# Altium PCB PSU_module.PcbDoc
Units mil, origin at the board's own origin, x right, y up, seen from the top; angles counter-clockwise.
Board outline 5905.51 x 3937.01 mil, 2 copper layers (Top Layer, Bottom Layer); 47 components, 31 nets, 121 pads, 10 vias.
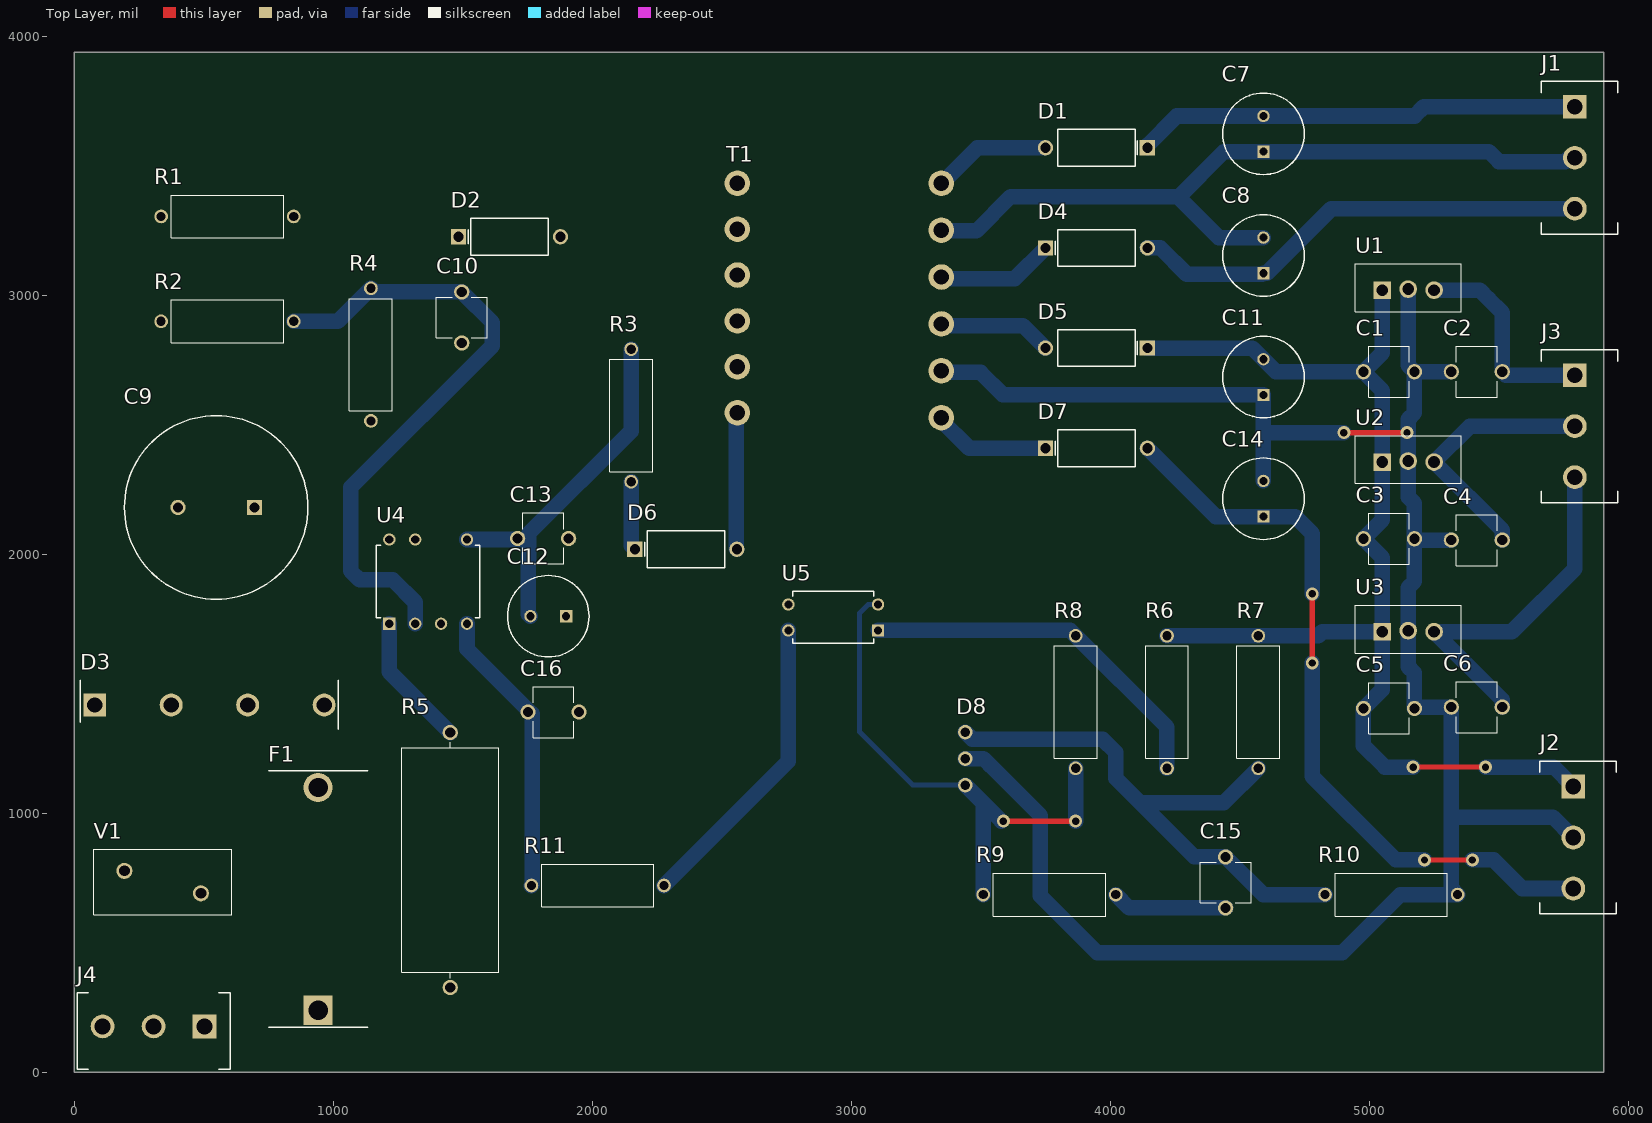
[diagram p0: Top Layer view]
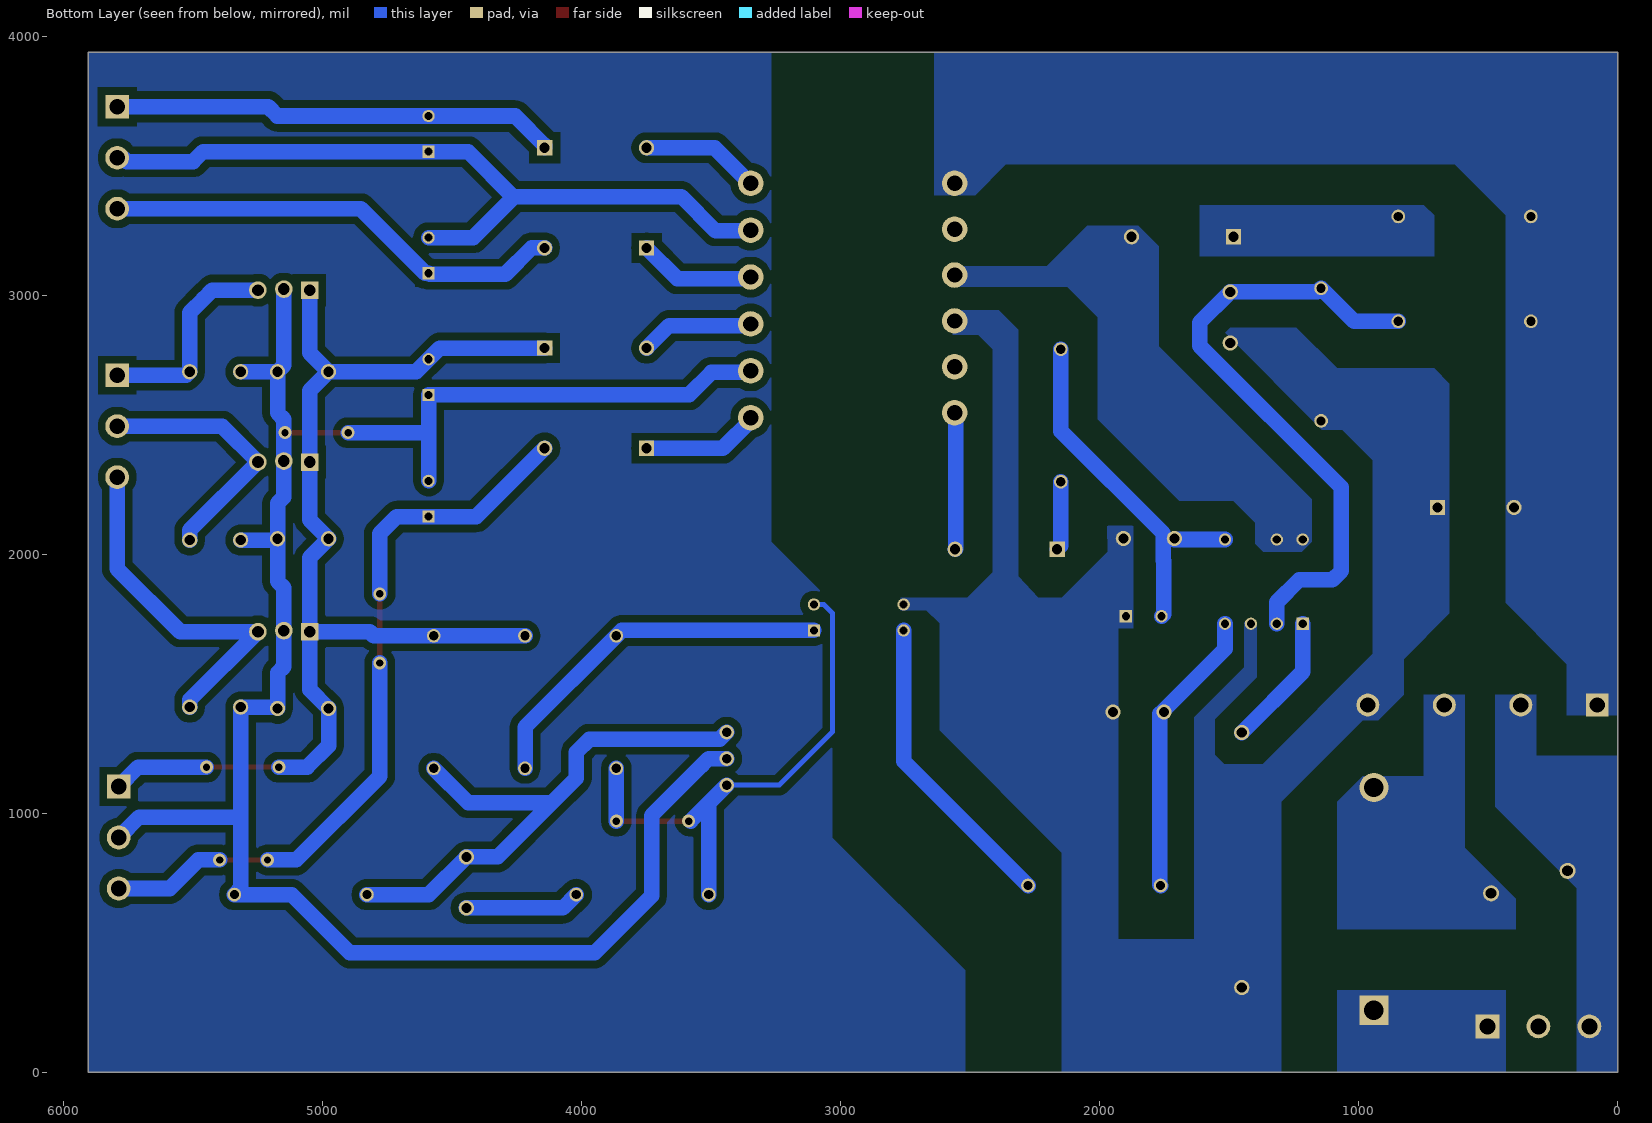
[diagram p1: Bottom Layer view, seen from below]
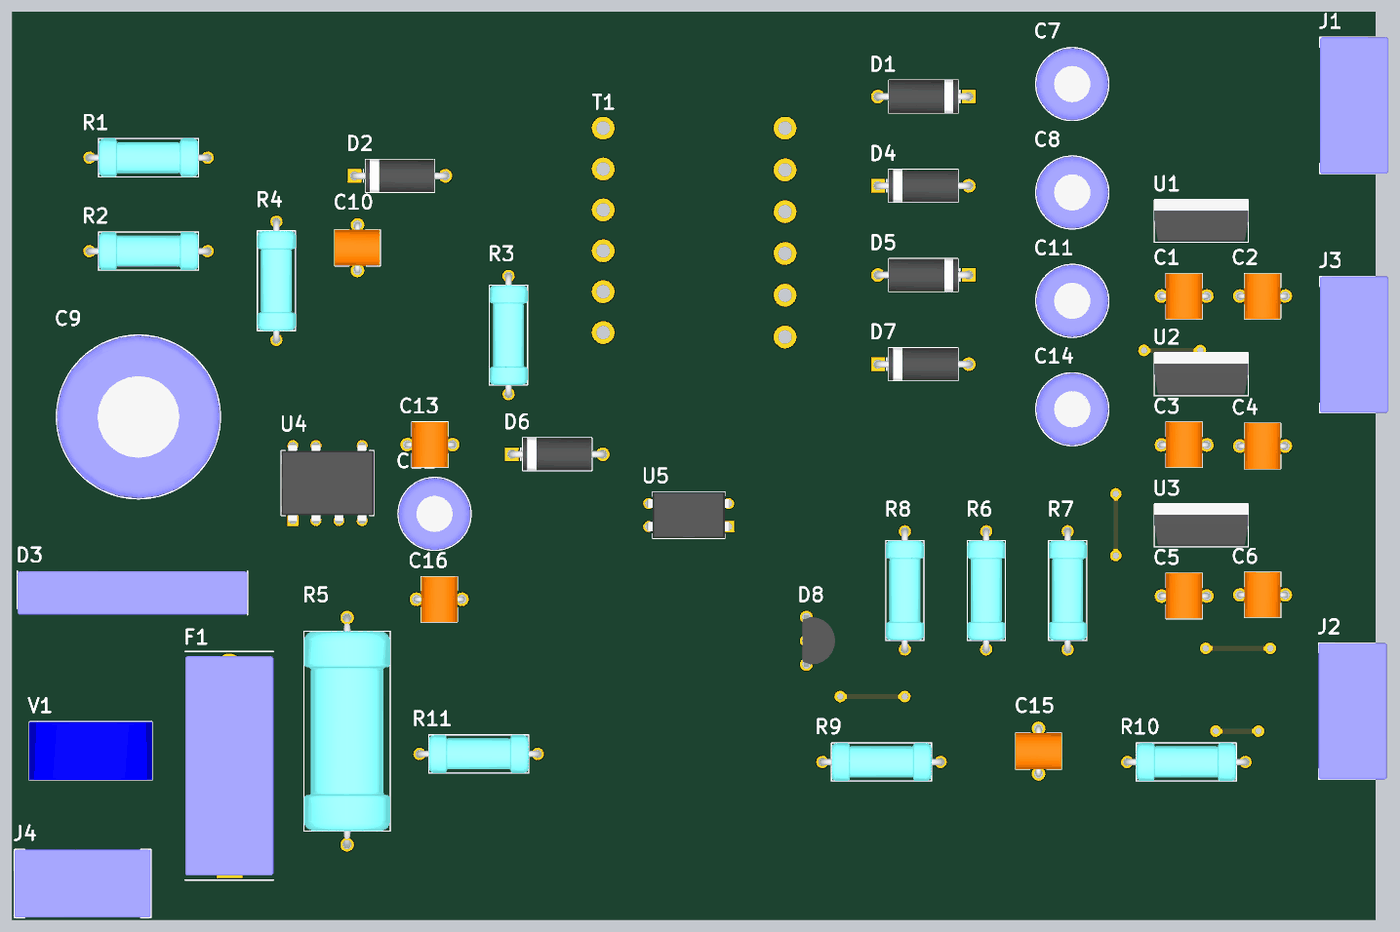
[diagram p2: 3D render of the assembled board from above, using the file's embedded part models]

## Layer stack, top to bottom
Top Solder: solder mask 0.4, Solder Resist, Dk 3.5
Top Layer: signal copper 1.4
Dielectric 1: dielectric 12.6, FR-4, Dk 4.8
Bottom Layer: signal copper 1.4
Bottom Solder: solder mask 0.4, Solder Resist, Dk 3.5

## Board outline
0,0 0,3937.01 5905.51,3937.01 5905.51,0

## Design rules (kind name [scope] priority, off if disabled: settings)
Clearance [All] p1: gap=10 ignorepadtopadclearanceinfootprint=FALSE except(0: Arc-Hole Track-Hole SMDPad-Hole THPad-Hole Via-Hole Fill-Hole Region-Hole Text-Hole; 30: Arc-Poly Track-Poly SMDPad-Poly THPad-Poly Via-Poly Fill-Poly Poly-Poly Poly-Region Poly-Text Poly-Hole)
HoleSize [All] p1: absolutevalues=TRUE maxlimit=200 minlimit=1 maxpercent=80.000 minpercent=20.000
PolygonConnect [All] p1: connectstyle=Direct reliefconductorwidth=10 reliefentries=4 polygonreliefangle="90 Angle" airgapwidth=10
RoutingVias [All] p1: holewidth=28 width=50 viastyle="Through Hole" minholewidth=28 minwidth=50 maxholewidth=28 maxwidth=50
SolderMaskExpansion [All] p1: expansion=4 istentingtop=FALSE
Width [All] p1: maxlimit=60 minlimit=10 preferedwidth=20
29 further rules are at their usual default settings.

## Components (designator, comment, footprint, x,y, rotation, side; value= is the part's Value field where it differs from the comment)
C1 "Capacitor-NP" C-NP 5075.65,2703.94 r180 top value=330nF
C2 "Capacitor-NP" C-NP 5415,2703.94 r0 top value=100nF
C3 "Capacitor-NP" C-NP 5075.65,2058.94 r180 top value=330nF
C4 "Capacitor-NP" C-NP 5415,2053.94 r0 top value=100nF
C5 "Capacitor-NP" C-NP 5075.65,1403.94 r180 top value=330nF
C6 "Capacitor-NP" C-NP 5415,1408.94 r0 top value=100nF
C7 "Capacitor-P" C-P-50V 4591.1,3622.36 r90 top value=47uF
C8 "Capacitor-P" C-P-50V 4591.1,3152.73 r90 top value=47uF
C9 "Capacitor-P" C-P-400V 547.64,2180 r180 top value=47uF
C10 "Capacitor-NP" C-NP 1496.06,2913.39 r90 top value=1nF
C11 "Capacitor-P" C-P-50V 4591.1,2683.1 r90 top value=47uF
C12 "Capacitor-P" C-P-50V 1830,1760 r180 top value=47uF
C13 "Capacitor-NP" C-NP 1810,2060 r180 top value=100nF
C14 "Capacitor-P" C-P-50V 4591.1,2213.46 r90 top value=47uF
C15 "Capacitor-NP" C-NP 4445,731.91 r270 top value=5nF
C16 "Capacitor-NP" C-NP 1850,1390 r180 top value=1nF
D1 "Diode" Diode 3946.1,3568.46 r180 top
D2 "Diode" Diode 1680,3225 r0 top
D3 "BridgeRectifier" BridgeRectifier 521.65,1417.32 r0 top
D4 "Diode" Diode 3946.1,3181.8 r0 top
D5 "Diode" Diode 3946.1,2795.13 r180 top
D6 "Diode" Diode 2361.1,2018.46 r0 top
D7 "Diode" Diode 3946.1,2408.46 r0 top
D8 "431-zener" 431-zener 3440,1312.36 r270 top
F1 "Fuse" FuseHolder 941.1,668.46 r90 top value="Fuse holder"
J1 "Molex Micro-Latch" ScrewTerminal 5811.1,3530 r270 top
J2 "Molex Micro-Latch" ScrewTerminal 5805.12,905.51 r270 top
J3 "Molex Micro-Latch" ScrewTerminal 5811.1,2493.46 r270 top
J4 "Molex Micro-Latch" ScrewTerminal 306.1,158.46 r180 top
R1 "1k" R-2W 591.1,3303.46 r0 top
R2 "1MOhm" R-2W 591.1,2898.46 r180 top
R3 "1k" R-2W 2150,2535 r90 top
R4 "10kOhm" R-2W 1145,2770 r90 top
R5 "390mOhm" R-5W 1451.1,818.46 r90 top
R6 "1k" R-2W 4218.6,1428.46 r90 top
R7 "1MOhm" R-2W 4571.1,1428.46 r90 top
R8 "1k" R-2W 3866.1,1428.46 r90 top
R9 "1k" R-2W 3765,685 r180 top
R10 "270kOhm" R-2W 5085,685 r180 top
R11 "120Ohm" R-2W 2020.63,720 r180 top
T1 "-" CustomTrafo 2560,3431.5 r0 top
U1 "Linear-regulator" LinearReg 5050,3018.94 r0 top
U2 "Linear-regulator" LinearReg 5050,2355 r0 top
U3 "Linear-regulator" LinearReg 5050,1700 r0 top
U4 "NCP11187" NCP11187 1366.1,1893.46 r0 top
U5 "Optocoupler" Opto 2930,1755 r90 top
V1 "Varistor" VARRBO750W80L1350T640H1650 341.1,733.46 r0 top

## Footprints (in the part's own frame and the unit in brackets; to place one, negate y for a bottom-side part, rotate by r counter-clockwise, add the part's x,y. Pads: shape width x height; smd on the part's side, far side on the other; paste and mask are expansions set on the pad)
431-zener [mm] "TO-92, 2.60 mm pitch; 3 pin, 5.21 mm W X 5.34 mm H body"
  round 1.43 hole 0.95 paste-1.43: 1(5.2,0) 2(0,0) 3(2.6,0)
  body extent -0.23,-0.45 5.43,3.15, height 9.34
BridgeRectifier [mm] "SIP, 7.50 mm pitch; 4 pin, 25.30 mm L X 4.80 mm W X 19.00 mm H body"
  rect 2.25x2.25 / inner round 2.25 / far side rect 2.25x2.25 hole 1.5 paste-2.25: 1(-11.25,0)
  round 2.25 hole 1.5 paste-2.25: 2(-3.75,0) 3(3.75,0) 4(11.25,0)
  silkscreen extent -12.65,-2.4 12.65,2.4, body extent -12.65,-2.4 12.65,2.4, height 19
C-NP [mm] "Capacitor, Radial (Disk), 5.00 mm Pitch X 0.80 mm W X 4.00 mm L X 5.00 mm T X 6.00 mm H body"
  round 1.5 hole 1 paste-1.5: 1(-2.5,0) 2(2.5,0)
  silkscreen extent -2,-2.5 2,2.5, body extent -2.8,-2.5 2.8,2.5, height 6
C-P-50V [mm] "Capacitor, Polarized, Radial (Electrolytic); 3.50 mm Pitch X 8.00 mm Dia X 11.50 mm H body"
  rect 1.21x1.21 / inner round 1.21 / far side rect 1.21x1.21 hole 0.8 paste-1.21: 1(-1.75,0)
  round 1.21 hole 0.8 paste-1.21: 2(1.75,0)
  silkscreen extent -4,-4 4,4, body extent -4,-4 4.01,4, height 11.51
C-P-400V [mm] "Capacitor, Polarized, Radial (Electrolytic); 7.50 mm Pitch X 18.00 mm Dia X 20.00 mm H body"
  rect 1.5x1.5 / inner round 1.5 / far side rect 1.5x1.5 hole 1 paste-1.5: 1(-3.75,0)
  round 1.5 hole 1 paste-1.5: 2(3.75,0)
  silkscreen extent -9,-9 9,9, body extent -9,-9 9.01,9, height 20.01
CustomTrafo [mm]
  round 2.5 hole 1.5: 1(0,0) 2(0,-4.5) 3(0,-9) 4(0,-13.5) 5(0,-18) 6(0,-22.5) 7(20,-22.987) 8(20,-18.39) 9(20,-13.792) 10(20,-9.195) 11(20,-4.597) 12(20,0)
Diode [mm] "Diode, Axial; 10.00 mm Pitch X 0.75 mm W 7.60 mm L X 5.00 mm Dia. body"
  round 1.5 hole 1 paste-1.5: A(5,0)
  rect 1.5x1.5 / inner round 1.5 / far side rect 1.5x1.5 hole 1 paste-1.5: C(-5,0)
  silkscreen extent -4.03,-1.8 3.8,1.8, body extent -5.38,-1.81 5.38,1.81, height 5.01
FuseHolder [mm] "SIP, 21.84 mm pitch; 2 pin, 24.16 mm L X 9.70 mm W X 11.00 mm H body"
  rect 2.85x2.85 / inner round 2.85 / far side rect 2.85x2.85 hole 1.9 paste-2.85: 1(-10.92,0)
  round 2.85 hole 1.9 paste-2.85: 2(10.92,0)
  silkscreen extent -12.57,-4.85 12.57,4.85, body extent -12.08,-4.85 12.08,4.85, height 11
LinearReg [mm] "Flange Mount (TO) Vertical, 2.54 mm pitch; 3 pin, 10.36 mm W X 4.70 mm H X 19.65 mm mounted height"
  rect 1.73x1.73 / inner round 1.73 / far side rect 1.73x1.73 hole 1.15 paste-1.73: 1(0,0)
  round 1.73 hole 1.15 paste-1.73: 2(2.54,0.1) 3(5.08,0)
  silkscreen extent -2.64,-2.1 7.72,2.6, body extent -2.64,-2 7.72,2.7, height 19.65
NCP11187 [mm] "DIP, 8.26 mm lead span, 2.54 mm pitch; 8 pin, 10.16 mm L X 7.11 mm W X 5.33 mm H body"
  rect 1.21x1.21 / inner round 1.21 / far side rect 1.21x1.21 hole 0.8 paste-1.21: 1(-3.81,-4.13)
  round 1.21 hole 0.8 paste-1.21: 2(-1.27,-4.13) 3(1.27,-4.13) 4(3.81,-4.13) 5(3.81,4.13) 6(-1.27,4.13) 7(-3.81,4.13)
  silkscreen extent -5.08,-3.55 5.08,3.55, body extent -5.08,-4.27 5.08,4.27, height 5.33
Opto [mm] "DIP, 8.80 mm lead span, 2.54 mm pitch; 4 pin, 5.10 mm L X 7.92 mm W X 4.50 mm H body"
  rect 1.21x1.21 / inner round 1.21 / far side rect 1.21x1.21 hole 0.8 paste-1.21: 1(-1.27,-4.4)
  round 1.21 hole 0.8 paste-1.21: 2(1.27,-4.4) 3(1.27,4.4) 4(-1.27,4.4)
  silkscreen extent -2.55,-3.96 2.55,3.96, body extent -2.55,-4.53 2.55,4.53, height 4.5
R-2W [mm] "Resistor, Axial; 13.00 mm Pitch X 0.70 mm W 11.00 mm L X 3.00 mm Dia. body"
  round 1.35 hole 0.9 paste-1.35: 1(-6.5,0) 2(6.5,0)
  silkscreen extent -5.5,-2.1 5.5,2.1, body extent -6.85,-2.1 6.85,2.1, height 3
R-5W [mm] "Resistor, Axial; 25.00 mm Pitch X 0.75 mm W 22.00 mm L X 5.00 mm Dia. body"
  round 1.5 hole 1 paste-1.5: 1(-12.5,0) 2(12.5,0)
  silkscreen extent -11.57,-4.75 11.57,4.75, body extent -12.88,-4.75 12.88,4.75, height 5
ScrewTerminal [mm] "SIP, 5.00 mm pitch; 3 pin, 15.00 mm L X 7.50 mm W X 10.00 mm H body"
  rect 2.33x2.33 / inner round 2.33 / far side rect 2.33x2.33 hole 1.55 paste-2.33: 1(-5,-0.45)
  round 2.33 hole 1.55 paste-2.33: 2(0,-0.45) 3(5,-0.45)
  silkscreen extent -7.5,-3.75 7.5,3.75, body extent -7.5,-3.75 7.5,3.75, height 10
VARRBO750W80L1350T640H1650 [mm] "Varistor, Radial (Disk with Offset Leads), 7.50 mm Pitch X 0.80 mm W X 13.50 mm L X 6.40 mm T X 16.50 mm H body"
  round 1.58 hole 1.05 paste-1.58: 1(-3.75,1.1) 2(3.75,-1.1)
  silkscreen extent -6.75,-3.2 6.75,3.2, body extent -6.75,-3.2 6.75,3.2, height 16.5

## Part data
F1: library part F_30A, FR_SN=F-04, Part Number=F_30A
J1 J2 J3 J4: library part "Molex Micro-Latch 1x3", Manufacturer Part Number=53254-0370, Supplier Part Number=538-53254-0370, ComponentLinkDescription=Datasheet, ComponentLinkURL=https://hr.mouser.com/datasheet/2/276/0532540370_PCB_HEADERS-171041.pdf, FR_SN=J-13, Part Number="Molex Micro-Latch 1x3"
R1 R2 R3 R4 R5 R6 R7 R8 R9 R10 R11: library part Resistor
T1: library part "Custom transformer", ComponentLinkDescription=-, ComponentLinkURL=-, DC Current Rating=-, FR_SN=T-2, Inductor Case Style=-, Manufacturer Part Number=-, Part Number="Custom transformer", Supplier Part Number=-
U5: library part ACPL-217, Diode Case Style=SOIC-4, Forward Current="50 mA", Manufacturer Part Number=ACPL-217-56BE, Max Reverse Voltage=6V, Supplier Part Number=630-ACPL-217-56BE, ComponentLinkDescription=Datasheet, ComponentLinkURL=https://eu.mouser.com/datasheet/2/678/AV02-0470EN_DS_ACPL-217_2018-02-12-1827799.pdf, Diode Type=-, FR_SN=D_LED-09, Part Number=ACPL-217
V1: library part B72314S2351K101, FR_SN=Var-01, Part Number=B72314S2351K101

## Via types
v1: diameter 50, hole 28, Top Layer to Bottom Layer, 10 vias

## Nets (pads, with @x,y where several pads share a name; then routed paths per layer and width w, separated by ;. In a path a pad name is that pad's centre, name@x,y a point inside that pad or via, vN(x,y) a via of type N, cw(c..) or ccw(c..) an arc to the next point about the centre after c; other vN are vias at no path point)
3V3: C6.2 J3.3 U3.3 | length 1397.6
  Bottom Layer w60: C6.2 5513.43,1436.57 U3.3 5550,1700 5793.39,1943.39 J3.3
5V: C4.2 J3.2 U2.3 | length 1010.9
  Bottom Layer w60: C4.2 5513.43,2091.57 U2.3 5388.46,2493.46 J3.2
9V: C2.2 J3.1 U1.3 | length 812.9
  Bottom Layer w60: U1.3 5426.06,3018.94 5459.98,2985.02 5513.43,2931.57 C2.2 5527.05,2690.32 J3.1
+12V: C1.2 C3.2 C5.2 C11.2 D5.C J2.1 R6.2 R7.2 U1.1 U2.1 U3.1 | length 4495.2
  Top Layer w20: v1(5169.29,1177.17) v1(5448.82,1177.17)
  Bottom Layer w60: D5.C 4547.97,2795.13 C11.2 4639.16,2703.94 C1.2 ; R6.2 R7.2 4802.74,1684.37 4818.37,1700 U3.1 ; U1.1 5050,2776.71 C1.2 ; v1(5169.29,1177.17) 5059.76,1177.17 4977.23,1259.7 C5.2 5050,1476.71 U3.1 ; v1(5448.82,1177.17) 5712.6,1177.17 J2.1 ; C1.2 5050,2631.17 U2.1 5050,2131.71 C3.2 5050,1986.17 U3.1
+15V_IGBT: C7.2 D1.C J1.1 | length 1721.6
  Bottom Layer w60: D1.C 4142.95,3577.95 4256.26,3691.26 C7.2 5174.45,3691.26 5210.04,3726.85 J1.1
-8V_IGBT: C8.1 D4.A J1.3 | length 1797.5
  Bottom Layer w60: D4.A 4193.2,3181.8 4295,3080 4587.27,3080 C8.1 4603.83,3083.83 4853.15,3333.15 J1.3
-12V: C14.1 D7.A J2.3 | length 2897.4
  Top Layer w20: v1(4779.53,1579.52) v1(4779.53,1846.46) ; v1(5212.6,818.9) v1(5397.64,818.9)
  Bottom Layer w60: D7.A 4406.85,2144.57 C14.1 4713.7,2144.57 4779.53,2078.74 v1(4779.53,1846.46) ; v1(4779.53,1579.52) 4779.53,1141.73 5102.36,818.9 v1(5212.6,818.9) ; v1(5397.64,818.9) 5480.32,818.9 5590.55,708.66 J2.3
DRAIN: D2.A T1.3 U4.6 U4.7
FB: C16.2 R11.2 U4.4 | length 1116.3
  Bottom Layer w60: U4.4 1516.1,1633.9 1767.68,1382.32 1767.68,1108.46 1767.68,722.95 R11.2
GND: C1.1 C2.1 C3.1 C4.1 C5.1 C6.1 C11.1 C14.2 D8.3 J2.2 R10.1 T1.8 U1.2 U2.2 U3.2 | length 7994.2
  Top Layer w20: v1(4901.57,2468.5) v1(5145.67,2468.5)
  Bottom Layer w60: T1.8@3343.5,2700.96 3499.04,2700.96 3585,2615 4590.3,2615 C11.1 4591.1,2468.5 ; D8.3 3510,1210 3534.98,1185.02 3730,990 3730,680 3950,460 4895,460 5120,685 5316.57,685 R10.1 5316.57,709.33 5316.57,984.25 ; C14.2 4591.1,2468.5 ; v1(4901.57,2468.5) 4591.1,2468.5 ; U1.2 5150,2728.02 C1.1 ; C4.1 5179.08,2053.94 C3.1 ; C2.1 C1.1 ; J2.2 5708.66,984.25 5316.57,984.25 ; C3.1 5174.08,2195.8 5150,2219.88 U2.2 5150,2520.49 5174.08,2544.57 C1.1 ; C3.1 5174.08,1894.57 5150,1870.49 U3.2 5150,1564.88 5174.08,1540.8 C5.1 5179.08,1408.94 C6.1 5316.57,984.25
GND_IGBT: C7.1 C8.2 J1.2 T1.11 | length 2995.5
  Bottom Layer w60: T1.11@3343.5,3243.96 3347.26,3247.72 3482.72,3247.72 3615,3380 4260,3380 4262.5,3377.5 ; C8.2 4418.37,3221.63 4262.5,3377.5 ; J1.2 5787.31,3523.93 5764.88,3523.93 5755.95,3515 5500,3515 5461.54,3553.46 C7.1 4438.46,3553.46 4262.5,3377.5
HV_330V: C9.2 D3.1 R1.1 R2.2 T1.1
HV_GND: C9.1 C10.1 C12.1 C13.1 C16.1 D3.4 R4.1 R5.1 T1.4 U4.3 U5.3
Line: F1.1 J4.1
NetC10_2: C10.2 R2.1 R4.2 U4.2 | length 2442.4
  Bottom Layer w60: R2.1 1017.56,2898.46 R4.2 1159.09,3011.81 C10.2 1614.17,2893.7 1614.17,2804.17 1066.93,2256.93 1066.93,1935.15 1102.08,1900 1230,1900 1316.1,1813.9 U4.2
NetC15_1: C15.1 D8.2 R7.1 R10.2 | length 2218.5
  Bottom Layer w60: D8.2 3467.36,1285 3970,1285 4020,1235 4020,1135 4115,1040 ; R7.1 4438.54,1040 4115,1040 ; R10.2 4590.34,685 C15.1 4324.66,830.34 4115,1040
NetC15_2: C15.2 R9.1 | length 445.4
  Bottom Layer w60: R9.1 4072.42,633.49 C15.2
NetD1_A: D1.A T1.12 | length 465.2
  Bottom Layer w60: T1.12@3343.5,3424.96 3487.01,3568.46 D1.A
NetD2_C: D2.C R1.2
NetD3_3: D3.3 F1.2 V1.2
NetD4_C: D4.C T1.10 | length 455
  Bottom Layer w60: T1.10@3343.5,3062.96 3630.41,3062.96 D4.C
NetD5_A: D5.A T1.9 | length 441.7
  Bottom Layer w60: T1.9@3343.5,2881.96 3662.42,2881.96 D5.A
NetD6_A: D6.A T1.6 | length 521.4
  Bottom Layer w60: T1.6@2556.1,2539.13 2556.1,2020.32 D6.A
NetD6_C: D6.C R3.1 | length 266.5
  Bottom Layer w60: R3.1 2150,2032.72 D6.C
NetD7_C: D7.C T1.7 | length 451.9
  Bottom Layer w60: T1.7@3343.5,2519.96 3455,2408.46 D7.C
NetD8_1: D8.1 R8.1 R9.2 U5.2 | length 2078.6
  Top Layer w20: v1(3586.65,968.54) v1(3866.1,968.54)
  Bottom Layer w20: U5.2 3065.15,1805 3031.5,1771.35 3031.5,1313.5 3237.36,1107.64 D8.1 ; v1@3579.09,968.54 v1(3586.65,968.54)
  Bottom Layer w60: D8.1 3509.09,1038.54 ; R9.2 3509.09,1038.54 ; v1@3579.09,968.54 3509.09,1038.54 ; v1(3866.1,968.54) R8.1
NetR5_2: R5.2 U4.1 | length 517.6
  Bottom Layer w60: U4.1 1216.1,1545.59 R5.2
NetR6_1: R6.1 R8.2 U5.1 | length 1429.2
  Bottom Layer w60: U5.1 3845.47,1705 R8.2 4218.6,1331.87 R6.1
NetR11_1: R11.1 U5.4 | length 1183.9
  Bottom Layer w60: R11.1 2756.77,1200.24 U5.4
Neutral: D3.2 J4.3 V1.1
VCC: C12.2 C13.2 R3.2 U4.5 | length 1394.4
  Bottom Layer w60: U4.5 C13.2@1711.57,2056.06 ; C12.2 1752.68,1768.43 1752.68,1973.46 1754.09,1974.88 1754.09,2079.09 2150,2475 R3.2
pads on no net: J4.2 T1.2 T1.5

## Polygon pours and split planes (outlines as drawn)
HV_GND on Bottom Layer "HV_GND_L02_P008" (solid, pour order 8): 1870,2106.38 1873.62,2110 1970,2110 1968.19,2008.19 2145.67,1830.71 2236.22,1830.71 2314.96,1914.7 2314.96,2866.14 2389.76,2940.94 2566.93,2940.94 2566.93,2846.46 2468.5,2846.46 2413.39,2791.34 2413.39,1929.13 2511.81,1830.71 2767.72,1830.71 2767.72,1783.46 2669.29,1783.46 2618.11,1732.28 2618.11,1318.9 2145.67,846.46 2145.67,0 1299.21,0 1299.21,1043.31 984.25,1358.27 925.2,1358.27 826.77,1456.69 826.77,1594.49 649.61,1771.65 649.61,2657.48 708.66,2716.54 1082.68,2716.54 1240.16,2874.02 1496.06,2874.02 1515.75,2854.33 1141.73,2480.32 1062.99,2480.32 944.88,2362.2 944.88,1614.17 1370.08,1188.98 1519.69,1188.98 1555.12,1224.41 1555.12,1362.2 1393.7,1523.62 1393.7,1736.22 1440.94,1736.22 1440.94,1562.99 1633.86,1370.08 1633.86,511.81 1929.13,511.81 1929.13,1712.6 1870,1712.6
no net on Bottom Layer "NONET_L02_P000" (solid, pour order 0): 3031.5,905.51 2519.68,393.7 2519.68,0 5905,0 5905.51,0.51 5905.51,3937.01 3267.72,3937.01 3267.72,2047.24 3031.5,1811.02 3031.5,1456.69
DRAIN on Bottom Layer "NETD2_A_L02_P007" (solid, pour order 7): 1771.65,2801.65 1181.1,2211.1 1181.1,2047.24 1220.47,2007.87 1367.87,2007.87 1400,2040 1400,2120 1484.72,2204.72 1692.91,2204.72 2007.87,2519.68 2007.87,2913.39 2125.98,3031.5 2559.06,3031.5 2559.06,3110.24 2204.72,3110.24 2047.24,3267.72 1850.39,3267.72 1771.65,3188.98
NetD2_C on Bottom Layer "NETD2_C_L02_P006" (solid, pour order 6): 708.66,3149.61 708.66,3307.09 748.03,3346.46 1614.17,3346.46 1614.17,3149.61 1338.58,3149.61
Line on Bottom Layer "LINE_L02_P005" (solid, pour order 5): 433.07,0 433.07,314.96 1082.68,314.96 1082.68,0
NetD3_3 on Bottom Layer "NETD3_3_L02_P004" (solid, pour order 4): 590.55,1456.69 590.55,866.14 393.7,669.29 393.7,551.18 1082.68,551.18 1082.68,1043.31 984.25,1141.73 748.03,1141.73 748.03,1456.69
Neutral on Bottom Layer "NEUTRAL_L02_P003" (solid, pour order 3): 314.96,1456.69 314.96,1220.47 0,1220.47 0,0 157.48,0 157.48,708.66 472.44,1023.62 472.44,1456.69
HV_330V on Bottom Layer "HV_330V_L02_P002" (solid, pour order 2): 0,1377.95 196.85,1377.95 196.85,1574.8 433.07,1811.02 433.07,3307.09 629.92,3503.94 2362.2,3503.94 2480.32,3385.83 2637.8,3385.83 2637.8,3937.01 0,3937.01

## Silkscreen, mask and mechanical layers (free items; w line width, h text height)
Mechanical 1:
  the board outline again, w1